# Altium PCB MCISO-P01-V00.PcbDoc
Units mil, origin at the board's own origin, x right, y up, seen from the top; angles counter-clockwise.
Board outline 6000 x 4000 mil, 2 copper layers (Top Layer, Bottom Layer); 109 components, 86 nets, 457 pads, 0 vias.
Unrouted connection lines stored in the file: 292.
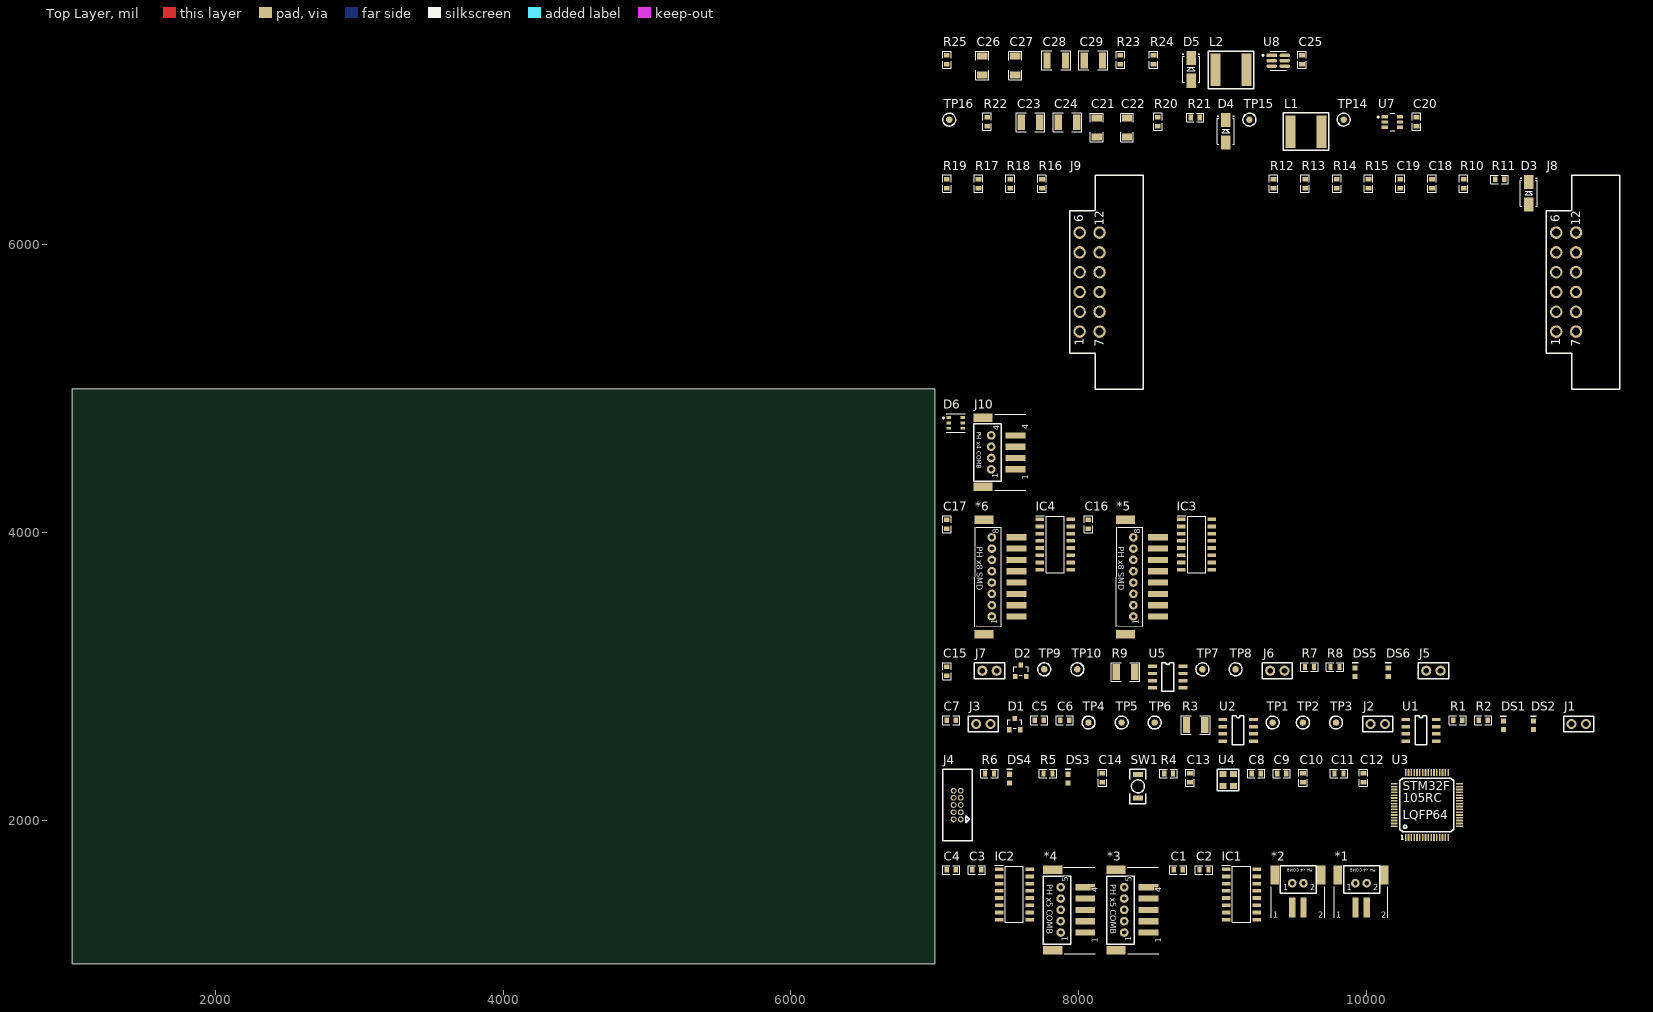
[diagram p0: Top Layer view]
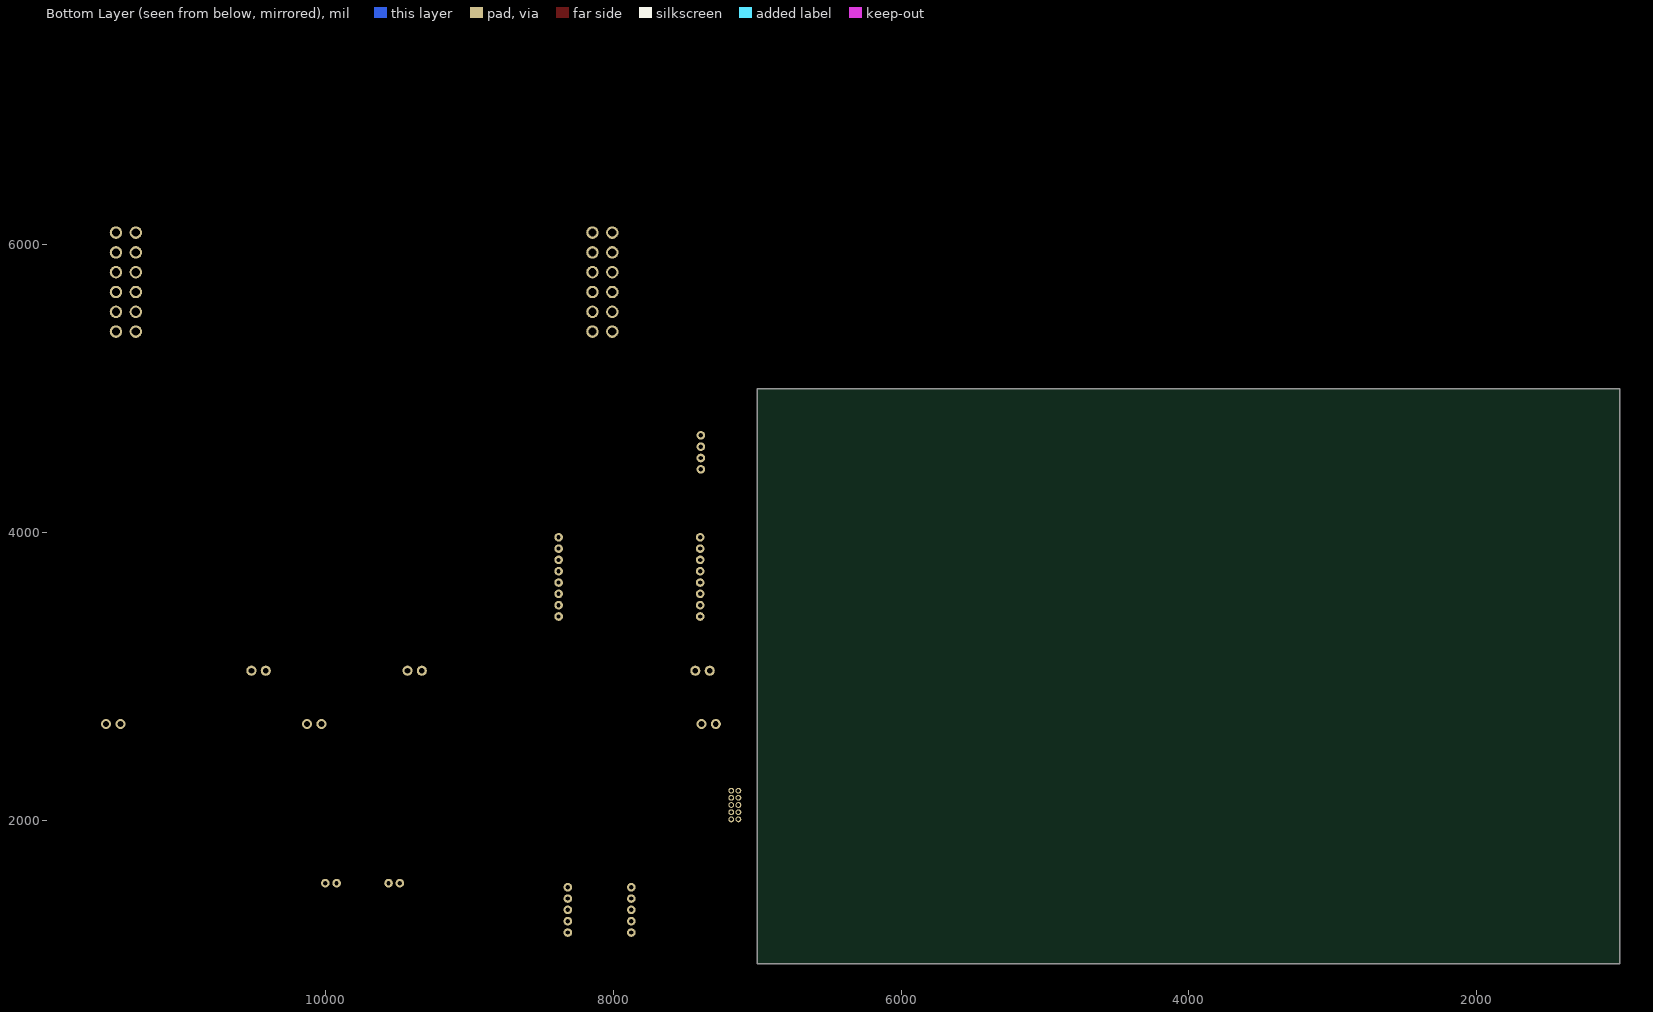
[diagram p1: Bottom Layer view, seen from below]

## Layer stack, top to bottom
Top Solder: solder mask 0.4, Solder Resist, Dk 3.5
Top Layer: signal copper 1.4
Dielectric 1: dielectric 12.6, FR-4, Dk 4.8
Bottom Layer: signal copper 1.4
Bottom Solder: solder mask 0.4, Solder Resist, Dk 3.5

## Board outline
1000,1000 7000,1000 7000,5000 1000,5000

## Design rules (kind name [scope] priority, off if disabled: settings)
Clearance [All] p1: gap=10 ignorepadtopadclearanceinfootprint=FALSE except(0: Arc-Hole Track-Hole SMDPad-Hole THPad-Hole Via-Hole Fill-Hole Poly-Hole Region-Hole Text-Hole)
PolygonConnect [All] p1: connectstyle=Relief reliefconductorwidth=10 reliefentries=4 polygonreliefangle="90 Angle" airgapwidth=10
RoomDefinition U_VCU-S04-V00-PSU5V [InComponentClass('U_VCU-S04-V00-PSU5V')] p1: confinementstyle=ConfineIn formatcopy=TRUE lockcomponents=FALSE outline 7044.64,7077.12 9706.18,7077.12 9706.18,7459.03 7044.64,7459.03
RoomDefinition U_VCU-S03-V00-PSU3V3 [InComponentClass('U_VCU-S03-V00-PSU3V3')] p2: confinementstyle=ConfineIn formatcopy=TRUE lockcomponents=FALSE outline 7045.62,6646.98 10502.48,6646.98 10502.48,7027.9 7045.62,7027.9
RoomDefinition U_VCU-S02-V00-12VProtection [InComponentClass('U_VCU-S02-V00-12VProtection')] p3: confinementstyle=ConfineIn formatcopy=TRUE lockcomponents=FALSE outline 7044.64,4986.46 12592.15,4986.46 12592.15,6596.78 7044.64,6596.78
RoomDefinition "U_USB-C Protection" [InComponentClass('U_USB-C Protection')] p4: confinementstyle=ConfineIn formatcopy=TRUE lockcomponents=FALSE outline 7044.64,4277.77 7660.81,4277.77 7660.81,4936.26 7044.64,4936.26
RoomDefinition U_MCISO-S08-V00-HallDifferentials [InComponentClass('U_MCISO-S08-V00-HallDifferentials')] p5: confinementstyle=ConfineIn formatcopy=TRUE lockcomponents=FALSE outline 7044.64,3254.1 8973.86,3254.1 8973.86,4227.57 7044.64,4227.57
RoomDefinition U_MCISO-S07-V00-CANMain [InComponentClass('U_MCISO-S07-V00-CANMain')] p6: confinementstyle=ConfineIn formatcopy=TRUE lockcomponents=FALSE outline 7044.64,2884 10584.18,2884 10584.18,3204.88 7044.64,3204.88
RoomDefinition U_MCISO-S05-V00-CANIsolation [InComponentClass('U_MCISO-S05-V00-CANIsolation')] p7: confinementstyle=ConfineIn formatcopy=TRUE lockcomponents=FALSE outline 7044.64,2513.9 11595.05,2513.9 11595.05,2834.78 7044.64,2834.78
RoomDefinition U_MCISO-S04-V00-Microcontroller [InComponentClass('U_MCISO-S04-V00-Microcontroller')] p8: confinementstyle=ConfineIn formatcopy=TRUE lockcomponents=FALSE outline 7044.64,1843.59 10682.61,1843.59 10682.61,2464.69 7044.64,2464.69
RoomDefinition MCISO-S01-V00-Master [InComponentClass('MCISO-S01-V00-Master')] p9: confinementstyle=ConfineIn formatcopy=TRUE lockcomponents=FALSE outline 7044.64,1056.15 10165.85,1056.15 10165.85,1793.39 7044.64,1793.39
RoutingVias [All] p1: holewidth=28 width=50 viastyle="Through Hole" minholewidth=28 minwidth=50 maxholewidth=28 maxwidth=50
SolderMaskExpansion [All] p1: expansion=4 istentingtop=FALSE
Width [All] p1: maxlimit=10 minlimit=10 preferedwidth=10
30 further rules are at their usual default settings.

## Classes and differential pairs
component class U_VCU-S04-V00-PSU5V: C25 C26 C27 C28 C29 D5 L2 L3 R23 R24 R25 U8
component class U_VCU-S03-V00-PSU3V3: C20 C21 C22 C23 C24 D4 L1 R20 R21 R22 TP14 TP15 TP16 U7
component class U_VCU-S02-V00-12VProtection: C18 C19 D3 J8 J9 R10 R11 R12 R13 R14 R15 R16 R17 R18 R19
component class "U_USB-C Protection": D6 J10
component class U_MCISO-S07-V00-CANMain: C15 D2 DS5 DS6 J5 J6 J7 R7 R8 R9 TP7 TP8 TP9 TP10 U5
component class U_MCISO-S08-V00-HallDifferentials: *5 *6 C16 C17 IC3 IC4
component class U_MCISO-S05-V00-CANIsolation: C5 C6 C7 D1 DS1 DS2 J1 J2 J3 R1 R2 R3 TP1 TP2 TP3 TP4 TP5 TP6 U1 U2
component class U_MCISO-S04-V00-Microcontroller: C8 C9 C10 C11 C12 C13 C14 DS3 DS4 J4 R4 R5 R6 SW1 U3 U4
component class MCISO-S01-V00-Master: *1 *2 *3 *4 C1 C2 C3 C4 Connector? IC1 IC2 NCM?

## Components (designator, comment, footprint, x,y, rotation, side; value= is the part's Value field where it differs from the comment)
*1 "JST PH 2x RIGHT COMB" "JST PH 2x RIGHT COMB" 10043.8,1676.26 r0 top
*2 "JST PH 2x RIGHT COMB" "JST PH 2x RIGHT COMB" 9603.82,1676.26 r0 top
*3 "JST PH 5x RIGHT COMB" "JST PH 5x RIGHT COMB" 8202.17,1335.7 r90 top
*4 "JST PH 5x RIGHT COMB" "JST PH 5x RIGHT COMB" 7761.21,1335.7 r90 top
*5 "JST PH 8x Right comb" "JST PH 8x RIGHT SMD" 8267.14,3612.38 r90 top
*6 "JST PH 8x Right comb" "JST PH 8x RIGHT SMD" 7282.84,3612.38 r90 top
C1 "100nF" Cap_Ceramic_0603 8694.32,1653.62 r0 top
C2 "100nF" Cap_Ceramic_0603 8872.48,1653.62 r0 top
C3 "100nF" Cap_Ceramic_0603 7292.68,1653.62 r0 top
C4 "100nF" Cap_Ceramic_0603 7114.52,1653.62 r0 top
C5 "100nF" Cap_Ceramic_0603 7726.76,2694.03 r0 top
C6 "100nF" Cap_Ceramic_0603 7904.91,2694.03 r0 top
C7 "100nF" Cap_Ceramic_0603 7114.52,2694.03 r0 top
C8 "100nF" Cap_Ceramic_0603 9235.69,2323.93 r0 top
C9 "100nF" Cap_Ceramic_0603 9412.86,2323.93 r0 top
C10 "100nF" Cap_Ceramic_0603 9561.49,2294.4 r90 top
C11 "100nF" Cap_Ceramic_0603 9811.5,2323.93 r0 top
C12 "4u7" Cap_Ceramic_0603 9981.79,2294.4 r90 top
C13 "100nF 100V" Cap_Ceramic_0603 8775.03,2294.4 r90 top
C14 "100nF 100V" Cap_Ceramic_0603 8165.75,2294.4 r90 top
C15 "100nF 100V" Cap_Ceramic_0603 7084.01,3034.6 r90 top
C16 "4u7 50V 5% X7R 0603" Cap_Ceramic_0603 8068.31,4057.28 r90 top
C17 "4u7 50V 5% X7R 0603" Cap_Ceramic_0603 7084.01,4057.28 r90 top
C18 "4u7 50V 5%" Cap_Ceramic_0603 10458.19,6426.49 r90 top
C19 "470nF 50V 5%" Cap_Ceramic_0603 10237.7,6426.49 r90 top
C20 "100nF 50V" Cap_Ceramic_0603 10350.9,6857.62 r90 top
C21 "22uF 35V" Cap_Ceramic_1206 8126.38,6817.26 r90 top
C22 "22uF 35V" Cap_Ceramic_1206 8337.02,6817.26 r90 top
C23 "47uF 16V 1210" Cap_Ceramic_1210 7665.73,6853.68 r0 top
C24 "47uF 16V 1210" Cap_Ceramic_1210 7923.61,6853.68 r0 top
C25 "100nF 100V" Cap_Ceramic_0603 9554.6,7288.74 r90 top
C26 "22uF 35V 1206" Cap_Ceramic_1206 7330.08,7248.39 r90 top
C27 "22uF 35V 1206" Cap_Ceramic_1206 7560.41,7248.39 r90 top
C28 "47uF 16V 1210" Cap_Ceramic_1210 7844.87,7283.82 r0 top
C29 "47uF 16V 1210" Cap_Ceramic_1210 8102.76,7283.82 r0 top
D1 "NUP2105L" NUP2105L 7556.47,2667.45 r0 top
D2 "NUP2105L" NUP2105L 7598.8,3037.55 r0 top
D3 "1N4448WQ-7-F" SMA 11131.45,6359.56 r90 top
D4 "B260A-13-F" SMA 9024.06,6790.69 r90 top
D5 "B260A-13-F" SMA 8782.91,7220.82 r90 top
D6 "PRTR5V0U4D" SC-47 7146.02,4762.04 r0 top
DS1 "LED Blue 0603" "LED BLUE 0603" 10954.27,2658.59 r90 top
DS2 "LED Blue 0603" "LED BLUE 0603" 11164.91,2658.59 r90 top
DS3 "LED Orange" "LED ORANGE 0603" 7927.55,2288.5 r90 top
DS4 "LED Orange" "LED ORANGE 0603" 7519.07,2288.5 r90 top
DS5 "LED Blue 0603" "LED BLUE 0603" 9923.71,3027.71 r90 top
DS6 "LED Blue 0603" "LED BLUE 0603" 10154.04,3027.71 r90 top
IC1 "SI8640BB-B-IS1R" SOIC127P600X175-16N 9133.32,1482.36 r0 top
IC2 "SI8640BB-B-IS1R" SOIC127P600X175-16N 7553.52,1482.36 r0 top
IC3 "AM26LS32ACDR" SOIC127P600X175-16N 8821.3,3916.53 r0 top
IC4 "AM26LS32ACDR" SOIC127P600X175-16N 7837.98,3916.53 r0 top
J1 "Jumper 2Way Pins" Jumper_2Way_Pin 11529.11,2668.44 r0 top
J2 "Jumper 2Way Pins" Jumper_2Way_Pin 10131.4,2668.44 r0 top
J3 "Jumper 2Way Pins" Jumper_2Way_Pin 7388.16,2668.44 r0 top
J4 "IDC 10P 2x5 1.27mm" "IDC 1.27MM 10P" 7155.86,2104.43 r90 top
J5 "Jumper 2Way Pins" Jumper_2Way_Pin 10518.23,3038.53 r0 top
J6 "Jumper 2Way Pins" Jumper_2Way_Pin 9432.55,3038.53 r0 top
J7 "Jumper 2Way Pins" Jumper_2Way_Pin 7430.48,3038.53 r0 top
J8 "MX120G" MX120G 11322.4,5741.42 r90 top
J9 "MX120G" MX120G 8008.26,5741.42 r90 top
J10 "JST PH 4x RIGHT COMB" "JST PH 4x RIGHT COMB" 7276.93,4557.31 r90 top
L1 "74404064221" Inductor_6x6mm 9579.21,6787.73 r0 top
L2 "74404064221" Inductor_6x6mm 9058.51,7217.87 r0 top
R1 "330R" Res_ThinFilm_0603 10637.33,2694.03 r0 top
R2 "330R" Res_ThinFilm_0603 10815.49,2694.03 r0 top
R3 "120R 1% 1210" Res_ThinFilm_1210 8814.41,2660.56 r0 top
R4 "4k7" Res_ThinFilm_0603 8626.41,2323.93 r0 top
R5 "330R" Res_ThinFilm_0603 7787.78,2323.93 r0 top
R6 "330R" Res_ThinFilm_0603 7380.28,2323.93 r0 top
R7 "330R" Res_ThinFilm_0603 9606.77,3064.13 r0 top
R8 "330R" Res_ThinFilm_0603 9783.94,3064.13 r0 top
R9 "120R 1% 1210" Res_ThinFilm_1210 8326.19,3029.68 r0 top
R10 "4k7 5% 0603" Res_ThinFilm_0603 10678.67,6426.49 r90 top
R11 "4k7 5% 0603" Res_ThinFilm_0603 10928.68,6456.02 r0 top
R12 "4k7 5% 0603" Res_ThinFilm_0603 9355.77,6426.49 r90 top
R13 "2M2 1%" Res_ThinFilm_0603 9576.25,6426.49 r90 top
R14 "2M2 1%" Res_ThinFilm_0603 9796.74,6426.49 r90 top
R15 "4k7 5% 0603" Res_ThinFilm_0603 10017.22,6426.49 r90 top
R16 "150k 5% 0603" Res_ThinFilm_0603 7745.46,6426.49 r90 top
R17 "390k 5%" Res_ThinFilm_0603 7304.49,6426.49 r90 top
R18 "240k 5%" Res_ThinFilm_0603 7524.97,6426.49 r90 top
R19 "1k 5% 0603" Res_ThinFilm_0603 7084.01,6426.49 r90 top
R20 "64k9 1%" Res_ThinFilm_0603 8551.6,6857.62 r90 top
R21 "1k" Res_ThinFilm_0603 8811.45,6887.15 r0 top
R22 "19k6 1%" Res_ThinFilm_0603 7364.53,6857.62 r90 top
R23 "111k 1%" Res_ThinFilm_0603 8290.76,7288.74 r90 top
R24 "1k" Res_ThinFilm_0603 8521.09,7288.74 r90 top
R25 "20k 1%" Res_ThinFilm_0603 7084.01,7288.74 r90 top
SW1 "B3U-1000P" "BTN B3U-1000P" 8412.81,2234.36 r90 top
TP1 "TestPoint_SMD" TestPointSMD 9349.87,2678.28 r0 top
TP2 "TestPoint_SMD" TestPointSMD 9560.51,2678.28 r0 top
TP3 "TestPoint_SMD" TestPointSMD 9790.83,2678.28 r0 top
TP4 "TestPoint_SMD" TestPointSMD 8069.29,2678.28 r0 top
TP5 "TestPoint_SMD" TestPointSMD 8299.62,2678.28 r0 top
TP6 "TestPoint_SMD" TestPointSMD 8529.94,2678.28 r0 top
TP7 "TestPoint_SMD" TestPointSMD 8861.65,3048.38 r0 top
TP8 "TestPoint_SMD" TestPointSMD 9091.98,3048.38 r0 top
TP9 "TestPoint_SMD" TestPointSMD 7761.21,3048.38 r0 top
TP10 "TestPoint_SMD" TestPointSMD 7991.53,3048.38 r90 top
TP14 "TestPoint_SMD" TestPointSMD 9843.98,6871.4 r90 top
TP15 "TestPoint_SMD" TestPointSMD 9188.44,6871.4 r90 top
TP16 "TestPoint_SMD" TestPointSMD 7100.74,6871.4 r90 top
U1 "Si8621BC-B-IS" Si8621BC-B-IS 10382.4,2624.14 r0 top
U2 "SN65HVD233" SN65HVD233DR 9109.7,2624.14 r0 top
U3 "STM32F105RC" STM32F105RC 10275.11,1878.04 r0 top
U4 "DSC1001DI1-008.0000T" DSC1001DI1-008.0000TCT-ND 9040.8,2278.65 r0 top
U5 "SN65HVD233" SN65HVD233DR 8620.5,2994.24 r0 top
U7 "LMR14010ADDCR" FP-DDC0006A-MFG 10183.57,6854.67 r0 top
U8 "LMR14010" LMR14010 9388.25,7281.85 r0 top

## Footprints (in the part's own frame and the unit in brackets; to place one, negate y for a bottom-side part, rotate by r counter-clockwise, add the part's x,y. Pads: shape width x height; smd on the part's side, far side on the other; paste and mask are expansions set on the pad)
"BTN B3U-1000P" [mil] "OMRON B3U-1000P"
  rect 35x70 smd: 1(-82.68,0) 2(82.68,0)
  silkscreen extent -120,-55 120,55, body extent -79,-49 79,49, height 63
Cap_Ceramic_0603 [mil]
  rect 30x40 smd: 1(-31.24,0) 2(31.24,0)
  silkscreen extent -60,-30 60,30, body extent -31,-16 32,16, height 33
Cap_Ceramic_1206 [mil]
  rect 47x71 smd: 1(-66.08,0) 2(66.08,0)
  silkscreen extent -100,-45 100,45, body extent -63,-31 63,32, height 53
Cap_Ceramic_1210 [mm]
  rect 1.3x2.8 smd: 1(-1.625,0) 2(1.625,0)
  silkscreen extent -2.54,-1.65 2.54,1.65, body extent -1.6,-1.25 1.6,1.25, height 1.35
DSC1001DI1-008.0000TCT-ND [mil]
  rect 48x43 smd: 1(-37.4,41.34) 2(37.4,41.34) 3(37.4,-41.34) 4(-37.4,-41.34)
  silkscreen extent -75,-75 75,75, body extent -49,-63 49,63, height 33
FP-DDC0006A-MFG [mm]
  rect 1.1x0.6 smd paste+0 mask+0: 1(-1.35,0.95) 2(-1.35,0) 3(-1.35,-0.95) 4(1.35,-0.95) 5(1.35,0) 6(1.35,0.95)
  silkscreen extent -2.65,-1.53 0.43,1.53, body extent -2,-1.63 2,1.63, height 0.25
"IDC 1.27MM 10P" [mil]
  round 40 hole 25: 1(-100,-25) 2(-100,25) 3(-50,-25) 4(-50,25) 5(0,-25) 6(0,25) 7(50,-25) 8(50,25) 9(100,-25) 10(100,25)
  silkscreen extent -250,-105 250,100, body extent -249,-104 249,100, height 214
Inductor_6x6mm [mm]
  rect 1.8x5.7 smd: 1(-2.667,0) 2(2.794,0)
  silkscreen extent -3.94,-3.3 4.06,3.3, body extent -3,-3 3,3, height 4.56
"JST PH 2x RIGHT COMB" [mm]
  rect 1.1x3.5 smd: 1(-3,-7.25) 2(-1,-7.25)
  round 1.524 hole 0.762: 1(-3,-2.921) 2(-1,-2.921)
  rect 1.5x3.4 smd: M(-6.1,-1.5) M(2.1,-1.5)
  silkscreen extent -6.73,-9.04 2.75,0.13, body extent -6.17,-8.03 1.97,0.23, height 5.89
"JST PH 4x RIGHT COMB" [mm]
  round 1.524 hole 0.762: 1(-3,-2.921) 2(-1,-2.921) 3(1,-2.921) 4(3,-2.921)
  rect 1.1x3.5 smd: 1(-3,-7.25) 2(-1,-7.25) 3(1,-7.25) 4(3,-7.25)
  rect 1.5x3.4 smd: M(-6.1,-1.5) M(6.1,-1.5)
  silkscreen extent -6.73,-9.02 6.73,0.13, body extent -6.07,-8.2 6.07,0.06, height 5.89
"JST PH 5x RIGHT COMB" [mm]
  round 1.524 hole 0.762: 1(-3,-2.921) 2(-1,-2.921) 3(1,-2.921) 4(3,-2.921) 4(5,-2.921)
  rect 1.1x3.5 smd: 1(-3,-7.25) 2(-1,-7.25) 3(1,-7.25) 4(3,-7.25) 4(5,-7.25)
  rect 1.5x3.4 smd: M(-6.1,-1.5) M(8.1,-1.5)
  silkscreen extent -6.73,-9.02 8.53,0.13, body extent -6,-8.03 8.15,0.23, height 5.89
"JST PH 8x RIGHT SMD" [mm]
  round 1.524 hole 0.762: 1(-5,-2.91) 2(-3,-2.91) 3(-1,-2.91) 4(1,-2.91) 5(3,-2.91) 6(5,-2.91) 7(7,-2.91) 8(9,-2.91)
  rect 1.1x3.5 smd: 1(-5,-7.25) 2(-3,-7.25) 3(-1,-7.25) 4(1,-7.25) 5(3,-7.25) 6(5,-7.25) 7(7,-7.25) 8(9,-7.25)
  rect 1.5x3.4 smd: M(-8.1,-1.5) M(12.1,-1.5)
  silkscreen extent -6.78,-4.6 10.8,0.13, body extent -8.12,-8 12.03,0.25, height 5.89
Jumper_2Way_Pin [mil]
  round 70 hole 40: 1(-100,0) 2(0,0)
  silkscreen extent -155,-55 55,55, body extent -142,-48 42,47, height 332
"LED BLUE 0603" [mil]
  rect 35x35 smd: 1(-30,0) 2(30,0)
  silkscreen extent 65,-20 65,20, body extent -40,-20 40,20, height 30
"LED ORANGE 0603" [mil]
  rect 35x35 smd: 1(-30,0) 2(30,0)
  silkscreen extent 65,-20 65,20, body extent -40,-20 40,20, height 30
LMR14010 [mil]
  rect 73.01x24.1 smd paste+0 mask+0: 1(-44.73,36.75)
  rrect100% 73.01x24.1 smd paste+0 mask+0: 2(-44.73,-0.65) 3(-44.73,-38.05) 4(45.84,-38.05) 5(45.84,-0.65) 6(45.84,36.75)
  silkscreen extent -110,-68 56,66, body extent -55,-58 56,56, height 43
MX120G [mm]
  round 2.2 hole 1.45: 1(-8.75,0) 2(-5.25,0) 3(-1.75,0) 4(1.75,0) 5(5.25,0) 6(8.75,0) 7(-8.75,-3.5) 8(-5.25,-3.5) 9(-1.75,-3.5) 10(1.75,-3.5) 11(5.25,-3.5) 12(8.75,-3.5)
  round 0 hole 4 mask+0.254: NC(-15.75,-5.7) NC(15.75,-5.7)
  silkscreen extent -18.9,-11.25 18.9,1.8, body extent -18.78,-32.1 18.58,0.36, height 24.48
NUP2105L [mm]
  rect 0.8x0.9 smd: 1(-0.95,-1) 2(0.95,-1) 3(0,1)
  silkscreen extent -1.27,-0.76 1.27,0.76, body extent -1.45,-1.22 1.45,1.18, height 1
Res_ThinFilm_0603 [mil]
  rect 30x40 smd: 1(-31.24,0) 2(31.24,0)
  silkscreen extent -60,-30 60,30, body extent -31,-16 32,16, height 18
Res_ThinFilm_1210 [mm]
  rect 1.3x2.8 smd: 1(-1.625,0) 2(1.625,0)
  silkscreen extent -2.54,-1.65 2.54,1.65, body extent -1.6,-1.25 1.6,1.25, height 0.6
SC-47 [mm]
  rect 0.8x0.5 smd: 1(-1.2,0.95) 2(-1.2,0) 3(-1.2,-0.95) 4(1.2,-0.95) 5(1.2,0) 6(1.2,0.95)
  silkscreen extent -2.29,-1.65 1.65,1.65, body extent -1.3,-1.45 1.3,1.45, height 1.14
Si8621BC-B-IS [mm]
  rect 1.55x0.6 smd: 1(-2.7,1.905) 2(-2.7,0.635) 3(-2.7,-0.635) 4(-2.7,-1.905) 5(2.7,-1.905) 6(2.7,-0.635) 7(2.7,0.635) 8(2.7,1.905)
  silkscreen extent -1.04,-2.54 1.04,2.54, body extent -3.01,-2.45 3.01,2.45, height 1.63
SMA [mm]
  rect 2.5x1.7 smd: A(-2,0) K(2,0)
  silkscreen extent -2.3,-1.52 2.67,1.52, body extent -2.52,-1.46 2.52,1.46, height 2.4
SN65HVD233DR [mm]
  rect 1.55x0.6 smd: 1(-2.7,1.903) 2(-2.7,0.633) 3(-2.7,-0.637) 4(-2.7,-1.907) 5(2.7,-1.907) 6(2.7,-0.637) 7(2.7,0.633) 8(2.7,1.903)
  silkscreen extent -1.04,-2.54 1.04,2.54, body extent -3.01,-2.45 3.01,2.45, height 1.63
SOIC127P600X175-16N [mm]
  rect 1.5x0.65 smd: 1(-2.7,4.445) 2(-2.7,3.175) 3(-2.7,1.905) 4(-2.7,0.635) 5(-2.7,-0.635) 6(-2.7,-1.905) 7(-2.7,-3.175) 8(-2.7,-4.445) 9(2.7,-4.445) 10(2.7,-3.175) 11(2.7,-1.905) 12(2.7,-0.635) 13(2.7,0.635) 14(2.7,1.905) 15(2.7,3.175) 16(2.7,4.445)
  silkscreen extent -3.45,-4.95 1.6,5.12, body extent -3,-4.95 3,4.95, height 1.75
STM32F105RC [mm]
  rect 0.3x1.2 smd: 1(0,0) 2(0.5,0) 3(1,0) 4(1.5,0) 5(2,0) 6(2.5,0) 7(3,0) 8(3.5,0) 9(4,0) 10(4.5,0) 11(5,0) 12(5.5,0) 13(6,0) 14(6.5,0) 15(7,0) 16(7.5,0) 33(7.5,11.5) 34(7,11.5) 35(6.5,11.5) 36(6,11.5) 37(5.5,11.5) 38(5,11.5) 39(4.5,11.5) 40(4,11.5) 41(3.5,11.5) 42(3,11.5) 43(2.5,11.5) 44(2,11.5) 45(1.5,11.5) 46(1,11.5) 47(0.5,11.5) 48(0,11.5)
  rect 1.2x0.3 smd: 17(9.5,2) 18(9.5,2.5) 19(9.5,3) 20(9.5,3.5) 21(9.5,4) 22(9.5,4.5) 23(9.5,5) 24(9.5,5.5) 25(9.5,6) 26(9.5,6.5) 27(9.5,7) 28(9.5,7.5) 29(9.5,8) 30(9.5,8.5) 31(9.5,9) 32(9.5,9.5) 49(-2,9.5) 50(-2,9) 51(-2,8.5) 52(-2,8) 53(-2,7.5) 54(-2,7) 55(-2,6.5) 56(-2,6) 57(-2,5.5) 58(-2,5) 59(-2,4.5) 60(-2,4) 61(-2,3.5) 62(-2,3) 63(-2,2.5) 64(-2,2)
  silkscreen extent -1,-0.3 8.5,10.5, body extent -2.25,-0.25 9.75,11.75, height 1.6
TestPointSMD [mil]
  round 45 smd: 1(0,0)
  silkscreen extent -45,-45 45,45

## Part data
C1 C2 C3 C4 C5 C6 C7 C8 C9 C10 C11 C20: library part "100nF 50V 5% X7R 0603", "Capacitor, Ceramic, SMD, 100nF, 50V, 5%, X7R, 0603"
C12 C18: library part "4u7 50V 5% X7R 0603", "Capacitor, Ceramic, SMD, 4u7, 50V, 5%, X7R, 0603"
C13 C14 C15 C25: library part "100nF 100V 5% X7R 0603", "Capacitor, Ceramic, SMD, 100nF, 100V, 5%, X7R, 0603"
C16 C17: "Capacitor, Ceramic, SMD, 4u7, 50V, 5%, X7R, 0603"
C19: library part "470nF 50V 5% X7R 0603", "Capacitor, Ceramic, SMD, 470nF, 50V, 5%, X7R, 0603"
C21 C22: library part "22uF 35V 20% X5R 1206", "22µF ±20% 35V Ceramic Capacitor X5R 1206 (3216 Metric)", ComponentLink1Description=Digikey, ComponentLink1URL=https://www.digikey.com.au/product-detail/en/tdk-corporation/C3216X5R1V226M160AC/445-8045-1-ND/2792165, ComponentLink2Description=Datasheet, ComponentLink2URL=https://product.tdk.com/info/en/catalog/datasheets/mlcc_commercial_general_en.pdf
C23 C24 C28 C29: library part "47uF 16V 10% X7R 1210", "Capacitor, Ceramic, SMD, 47uF, 16V, 5%, X7R, 1210"
C26 C27: library part "22uF 35V 10% X7R 1206", "Capacitor, Ceramic, SMD, 22uF, 35V, 10%, X7R, 1206"
D3: "Diode, SMD, 75V, 5%, 250mA, SOD123", Average Rectified Current=150mA, Forward Voltage=1V, Manufacturer="ON Semiconductor / Fairchild", Manufacturer Part Number=1N914BWS, Max Forward Surge Current (Ifsm)=4A, Max Operating Temperature=150°C, Max Repetitive Reverse Voltage (Vrrm)=75V, Max Reverse Leakage Current=5uA, Min Operating Temperature=-55°C, Package Quantity=1, Power Dissipation=200mW, Category="Rectifier Diodes", Contact Plating=Tin,Matte, Element Configuration=Single, Forward Current=150mA, Height=1mm, Lead Free="Lead Free", Length=1.8mm, Max Reverse Voltage (DC)=75V, Mount="Surface Mount", Number of Pins=2, Packaging="Tape and Reel", Peak Reverse Current=5uA, Radiation Hardening=No, REACH SVHC="No SVHC", Recovery Time=4ns, Reverse Recovery Time=4ns, Reverse Voltage=75V, Weight=0.0276g, Width=1.35mm
D4 D5: "Diode, Schottky Barrier Rectifier, 60 V, 2 A, B260A-13-F"
D6: "Clamp Ipp Tvs Diode Surface Mount 6-TSOP"
DS1 DS2 DS5 DS6: library part "LED BLUE 0603"
DS3 DS4: library part "LED ORANGE 0603"
IC1 IC2: "Integrated Circuit", Manufacturer_Name="Silicon Labs", Mouser Part Number=634-SI8640BB-B-IS1R, Arrow Part Number=SI8640BB-B-IS1R, Arrow Price/Stock=https://www.arrow.com/en/products/si8640bb-b-is1r/silicon-labs, Datasheet Link=https://www.arrow.com/en/products/si8640bb-b-is1r/silicon-labs, Height=1.75mm, Manufacturer_Part_Number=SI8640BB-B-IS1R, Mouser Price/Stock=https://www.mouser.co.uk/ProductDetail/Silicon-Labs/SI8640BB-B-IS1R?qs=j6MGy4L9yX09sv%252BEYaun9w%3D%3D
IC3 IC4: "Integrated Circuit", Manufacturer_Name="Texas Instruments", Mouser Part Number=595-AM26LS32ACDR, Arrow Part Number=AM26LS32ACDR, Arrow Price/Stock=https://www.arrow.com/en/products/am26ls32acdr/texas-instruments, Datasheet Link=http://www.ti.com/lit/gpn/am26ls32ac, Height=1.75mm, Manufacturer_Part_Number=AM26LS32ACDR, Mouser Price/Stock=https://www.mouser.co.uk/ProductDetail/Texas-Instruments/AM26LS32ACDR/?qs=L4Mc90zKIpjEhSPPcfdoEw%3D%3D
J1 J2 J3 J5 J6 J7: library part "Jumper 2Way Side Pins", "Jumper 2Way Side Pins"
J8 J9: "MX120G with standard connector layout"
L1 L2: "FIXED IND 220UH 660MA 850 MOHM", ComponentLink1Description=Digikey, ComponentLink1URL=https://www.digikey.com.au/product-detail/en/w%C3%BCrth-elektronik/74404064221/732-7261-1-ND/5353241, ComponentLink2Description="LCSC A", ComponentLink2URL=https://lcsc.com/product-detail/Power-Inductors_Sunlord-SWPA6045S221MT_C91047.html, ComponentLink3Description="LCSC B", ComponentLink3URL=https://lcsc.com/product-detail/Power-Inductors_SXN-Shun-Xiang-Nuo-Elec-SMNR6045-221MT_C467145.html
R1 R2 R5 R6 R7 R8: library part "330R 5% 0603", "Resistor, SMD, 330R, 0.1W, 5%, 0603"
R3 R9: "Resistor, SMD, 120R, 0.25W, 1%, 1210"
R4: library part "4k7 5% 0603", "Resistor, SMD, 4k7, 0.1W, 5%, 0603"
R10 R11 R12 R15: "Resistor, SMD, 4k7, 0.1W, 5%, 0603"
R13 R14: library part "2M2 1% 0603", "Resistor, SMD, 2M2, 0.125W, 1%, 0603"
R16: library part "150k 5%, 0603", "Resistor, SMD, 150k, 0.1W, 5%, 0603"
R17: library part "390k 5% 0603", "Resistor, SMD, 390k, 0.1W, 5%, 0603"
R18: library part "240k 5% 0603", "Resistor, SMD, 240k, 0.1W, 5%, 0603"
R19: "Resistor, SMD, 1k, 0.1W, 5%, 0603"
R20: library part "64k9 1% 0603", "Resistor, SMD, 64k9, 0.1W, 5%, 0603"
R21 R24: library part "1k 5% 0603", "Resistor, SMD, 1k, 0.1W, 5%, 0603"
R22: library part "19k6 1% 0603", "Resistor, SMD, 19k6, 0.1W, 5%, 0603"
R23: library part "111k 1% 0603", "Resistor, SMD, 111k, 0.1W, 5%, 0603"
R25: library part "20k 1% 0603", "Resistor, SMD, 20k, 0.1W, 1%, 0603"
SW1: library part "BTN B3U-1000P", "Omron B3U-1000P Ultra Miniture Switch", ComponentLink1Description=LCSC, ComponentLink1URL=https://lcsc.com/product-detail/Tactile-Switches_BRIGHT-TSA063G50-250_C294565.html
U3: "ARM® Cortex®-M3 STM32F1 Microcontroller IC 32-Bit 72MHz 256KB (256K x 8) FLASH 64-LQFP (10x10)", ComponentLink1Description=Digikey, ComponentLink1URL=https://www.digikey.com.au/product-detail/en/stmicroelectronics/STM32F105RCT6TR/497-17397-1-ND/8024118, ComponentLink2Description=Datasheet, ComponentLink2URL=https://www.st.com/content/ccc/resource/technical/document/datasheet/e4/f3/1a/89/5a/02/46/ae/CD00220364.pdf/files/CD00220364.pdf/jcr:content/translations/en.CD00220364.pdf
U4: "on 8MHz XO (Standard) CMOS Oscillator 1.8 ~ 3.3V Standby (Power Down) 4-SMD, No Lead"
U7: library part CMP-04918-000056-1, "IC REG BUCK ADJ 1A TSOT23-6", Manufacturer="Texas Instruments", Max Junction Temp=+125°C, Max Supply Voltage=40V, Min Supply Voltage=4V, Output Current=1A, Package=DDC0006A, Switching Frequency=700kHz, Temperature="-40°C to +125°C", Temperature Range Low=-40°C, Automotive=No, Category=IC, ComponentLink2Description=Datasheet, ComponentLink2URL=https://www.ti.com/lit/ds/symlink/lmr14010a.pdf, Device Class L1="Integrated Circuits (ICs)", Device Class L2="Power Management ICs", Device Class L3="Voltage Regulators - Switching", Digikey Description="IC REG BUCK ADJ 1A TSOT23-6", Height=1.1mm, Ipc Land Pattern Name=SOT95P280X110-6, Lead Free=Yes, Manufacturer Part Number=LMR14010ADDCR, Max Duty Cycle=96%, Mouser Description="4-V to 40-V, 1-A Step-Down Converter With High Efficiency Eco-Mode 6-SOT-23-THIN -40 to 125", Number Of Outputs=1, Octopart=https://octopart.com/lmr14010addcr-texas+instruments-90753290, Output Type=AdjustableProgrammable, RoHS=TRUE, Standoff Height=0mm, Switching Topology=Buck, Temperature Range High=+125°C
D1 D2: ComponentLink1Description=Datasheet, ComponentLink1URL=https://www.onsemi.cn/PowerSolutions/document/NUP2105L-D.PDF, ComponentLink2Description=LCSC, ComponentLink2URL=https://lcsc.com/product-detail/TVS_ON-Semiconductor-NUP2105LT1G_C14486.html, ComponentLink3Description=Digikey, ComponentLink3URL=https://www.digikey.com.au/product-detail/en/on-semiconductor/SZNUP2105LT1G/SZNUP2105LT1GOSCT-ND/3487669
U1: ComponentLink1Description=Digikey, ComponentLink1URL=https://www.digikey.com.au/product-detail/en/silicon-labs/SI8621BC-B-ISR/336-4774-1-ND/8611005, ComponentLink2Description=Datasheet, ComponentLink2URL=https://www.silabs.com/documents/public/data-sheets/si861x-2x-datasheet.pdf
U2 U5: ComponentLink1Description=LCSC, ComponentLink1URL=https://lcsc.com/product-detail/CAN-ICs_Texas-Instruments_SN65HVD233DRG4_Texas-Instruments-Texas-Instruments-SN65HVD233DRG4_C61643.html, ComponentLink2Description=Digikey, ComponentLink2URL=https://www.digikey.com.au/product-detail/en/texas-instruments/SN65HVD233DR/296-35967-1-ND/4134960, ComponentLink3Description=Datasheet, ComponentLink3URL=https://www.ti.com/lit/ds/symlink/sn65hvd233.pdf?ts=1588560888178, ComponentLink4Description="Ti Product Page", ComponentLink4URL=https://www.ti.com/product/SN65HVD233

## Nets (pads, with @x,y where several pads share a name; then routed paths per layer and width w, separated by ;. In a path a pad name is that pad's centre, name@x,y a point inside that pad or via, vN(x,y) a via of type N, cw(c..) or ccw(c..) an arc to the next point about the centre after c; other vN are vias at no path point)
3V3: C6.2 C8.2 C9.2 C10.2 C11.2 C12.2 C13.2 C15.2 C23.2 C24.2 J1.1 J4.1 J5.1 J7.1 L1.2 R4.2 R5.2 R6.2 R20.2 R21.2 TP14.1 U1.1 U3.1 U3.13 U3.19 U3.32 U3.48 U3.64 U4.1 U4.4 U5.3
5V: *5.8 *6.8 C1.2 C4.2 C16.2 C17.2 C28.2 C29.2 IC1.1 IC2.1 IC3.16 IC4.16 L2.2 R23.2 R24.2
"5V ISO": *3.1 *4.1 C2.2 C3.2 IC1.16 IC2.16
12V: C19.2 J8.4 J8.5 J8.10 J8.11 J9.4 J9.5 J9.10 J9.11 R10.2 R11.2 R12.2 R13.2 R14.2
12VP: C18.2 C21.2 C22.2 C26.2 C27.2 D3.K R15.2 U7.4 U7.5 U8.4 U8.5
"CAN1 RX": R2.1 TP6.1 U1.3 U3.57
"CAN1 TX": R1.1 TP3.1 U1.2 U3.58
"CAN2 RX": R8.1 TP10.1 U3.33 U5.4
"CAN2 TX": R7.1 TP8.1 U3.34 U5.1
"CAN H": *1.1 *2.1 D1.2 J2.1 TP1.1 U2.7
"CAN L": *1.2 *2.2 D1.1 R3.1 TP4.1 U2.6
"CAN LBK": J3.2 U2.5
"CAN LED": DS1.1 DS2.1 J1.2
"CAN MAIN H": D2.2 J6.1 TP7.1 U5.7
"CAN MAIN L": D2.1 R9.1 TP9.1 U5.6
"CAN MAIN LBK": J7.2 U5.5
"CAN MAIN LED": DS5.1 DS6.1 J5.2
"CAN MAIN RX LED": DS6.2 R8.2
"CAN MAIN TX LED": DS5.2 R7.2
"CAN RX LED": DS2.2 R2.2
"CAN TX LED": DS1.2 R1.2
CANH: J8.2 J8.8 J9.2 J9.8
CANL: J8.1 J8.7 J9.1 J9.7
CLMODE: R16.2
FLAG: 
GND: *5.1 *6.1 C1.1 C3.1 C4.1 C6.1 C8.1 C9.1 C10.1 C11.1 C12.1 C13.1 C14.1 C15.1 C16.1 C17.1 C18.1 C19.1 C21.1 C22.1 C23.1 C24.1 C26.1 C27.1 C28.1 C29.1 D2.3 D3.A D4.A D5.A D6.2 IC1.8 IC2.8 IC2.9 IC3.8 IC3.12 IC4.8 IC4.12 J4.3 J4.5 J4.9 J8.3 J8.6 J8.9 J8.12 J9.3 J9.6 J9.9 J9.12 J10.4 R16.1 R17.1 R18.1 R19.1 R22.1 R25.1 SW1.1 U1.4 U3.6 U3.12 U3.18 U3.31 U3.47 U3.63 U4.2 U5.2 U5.8 U7.2 U8.2
"GND ISO": C2.1 IC1.9
"HALL 1A M1": *6.7 IC4.2
"HALL 1A M2": *5.7 IC3.2
"HALL 1B M1": *6.6 IC4.1
"HALL 1B M2": *5.6 IC3.1
"HALL 2A M1": *6.5 IC4.6
"HALL 2A M2": *5.5 IC3.6
"HALL 2B M1": *6.4 IC4.7
"HALL 2B M2": *5.4 IC3.7
"HALL 3A M1": *6.3 IC4.10
"HALL 3A M2": *5.3 IC3.10
"HALL 3B M1": *6.2 IC4.9
"HALL 3B M2": *5.2 IC3.9
"ISO 3V3": C5.2 C7.2 J3.1 U1.8 U2.3
"ISO CAN RX": TP5.1 U1.6 U2.4
"ISO CAN TX": TP2.1 U1.7 U2.1
"ISO GND": C5.1 C7.1 D1.3 U1.5 U2.2 U2.8
"LED 5V": R24.1
"M1 H1": IC1.3 IC3.3
"M1 H1 ISO": *3.2 IC1.14
"M1 H2": IC1.4 IC3.5
"M1 H2 ISO": *3.3 IC1.13
"M1 H3": IC1.5 IC3.11
"M1 H3 ISO": *3.4 IC1.12
"M2 H1": IC2.3 IC4.3
"M2 H1 ISO": *4.2 IC2.14
"M2 H2": IC2.4 IC4.5
"M2 H2 ISO": *4.3 IC2.13
"M2 H3": IC2.5 IC4.11
"M2 H3 ISO": *4.4 IC2.12
NetDS3_1: DS3.1 R5.1
NetDS4_1: DS4.1 R6.1
NetDS7_1: R10.1
NetDS8_1: R11.1
NetDS9_1: R12.1
NetDS10_1: R15.1
NetDS11_1: R21.1
NetJ2_2: J2.2 R3.2
NetJ6_2: J6.2 R9.2
NRST: C14.2 J4.10 R4.1 SW1.2 U3.7
"ORANGE LED 1": DS3.2 U3.35
"ORANGE LED 2": DS4.2 U3.36
"OSC IN": U3.5 U4.3
OVLO: R14.1 R18.2
"PWR CB 3V3": C20.1 U7.1
"PWR CB 5V": C25.1 U8.1
"PWR FB 3V3": R20.1 R22.2 TP16.1 U7.3
"PWR FB 5V": R23.1 R25.2 U8.3
"PWR SW 3V3": C20.2 D4.K L1.1 TP15.1 U7.6
"PWR SW 5V": C25.2 D5.K L2.1 U8.6
SETI: R19.2
SWCLK: J4.4 U3.49
SWDIO: J4.2 U3.46
"USB D N": D6.1 D6.6 J10.3
"USB D P": D6.3 D6.4 J10.2
"USB DM": U3.44
"USB DP": U3.45
UVLO: R13.1 R17.2
UVOV: 
VUSB: D6.5 J10.1
pads on no net: *1.M *2.M *3.M *4.M *5.M *6.M IC1.2 IC1.6 IC1.7 IC1.10 IC1.11 IC1.15 IC2.2 IC2.6 IC2.7 IC2.10 IC2.11 IC2.15 IC3.4 IC3.13 IC3.14 IC3.15 IC4.4 IC4.13 IC4.14 IC4.15 J4.6 J4.7 J4.8 J8.NC J9.NC J10.M U3.2 U3.3 U3.4 U3.8 U3.9 U3.10 U3.11 U3.14 U3.15 U3.16 U3.17 U3.20 U3.21 U3.22 U3.23 U3.24 U3.25 U3.26 U3.27 U3.28 U3.29 U3.30 U3.37 U3.38 U3.39 U3.40 U3.41 U3.42 U3.43 U3.50 U3.51 U3.52 U3.53 U3.54 U3.55 U3.56 U3.59 U3.60 U3.61 U3.62

## Text inside footprints (layer, text, board x,y; h text height)
*1: Top Overlay "1" at 9863.8,1511.26 h40; Top Overlay "2" at 10050.77,1510 h40; Top Overlay "PH x4 COMB" at 10068.04,1660.42 h19.68 r180; Top Overlay "1" at 9792.89,1322.01 h40; Top Overlay "2" at 10106.87,1322.01 h40
*2: Top Overlay "1" at 9423.82,1511.26 h40; Top Overlay "2" at 9610.78,1510 h40; Top Overlay "PH x4 COMB" at 9628.06,1660.42 h19.68 r180; Top Overlay "1" at 9352.91,1322.01 h40; Top Overlay "2" at 9666.89,1322.01 h40
*3: Top Overlay "4" at 8575.67,1497.45 h40 r90; Top Overlay "1" at 8575.27,1145.3 h40 r90; Top Overlay "PH x5 COMB" at 8219,1552.59 h40 r270; Top Overlay "5" at 8369.42,1571.01 h40 r90; Top Overlay "1" at 8367.17,1155.7 h40 r90
*4: Top Overlay "4" at 8134.7,1497.45 h40 r90; Top Overlay "1" at 8134.3,1145.3 h40 r90; Top Overlay "PH x5 COMB" at 7778.03,1552.59 h40 r270; Top Overlay "5" at 7928.45,1571.01 h40 r90; Top Overlay "1" at 7926.21,1155.7 h40 r90
*5: Top Overlay "PH x8 SMD" at 8275.99,3900.84 h40 r270; Top Overlay "1" at 8419.62,3362.46 h40 r90; Top Overlay "8" at 8428.47,3992.38 h40 r90
*6: Top Overlay "PH x8 SMD" at 7291.69,3900.84 h40 r270; Top Overlay "1" at 7435.32,3362.46 h40 r90; Top Overlay "8" at 7444.17,3992.38 h40 r90
J8: Top Overlay "12" at 11489.57,6133.31 h60 r90; Top Overlay "6" at 11347.84,6156.93 h60 r90; Top Overlay "7" at 11489.57,5290.79 h60 r90; Top Overlay "1" at 11351.77,5298.67 h60 r90
J9: Top Overlay "12" at 8175.43,6133.31 h60 r90; Top Overlay "6" at 8033.7,6156.93 h60 r90; Top Overlay "7" at 8175.43,5290.79 h60 r90; Top Overlay "1" at 8037.63,5298.67 h60 r90
J10: Top Overlay "1" at 7441.93,4377.31 h40 r90; Top Overlay "4" at 7446.93,4712.31 h40 r90; Top Overlay "PH x4 COMB" at 7292.93,4699.98 h29.53 r270; Top Overlay "1" at 7650.03,4366.92 h40 r90; Top Overlay "4" at 7650.43,4719.06 h40 r90
U3: Top Overlay "STM32F" at 10253.61,2206.94 h60; Top Overlay "105RC" at 10253.61,2124.26 h60; Top Overlay "LQFP64" at 10253.61,2006.15 h60